# Altium PCB PCB2.PcbDoc
Units mm, origin at the board's own origin, x right, y up, seen from the top; angles counter-clockwise.
Board outline 104.65 x 36.58 mm, 2 copper layers (Top Layer, Bottom Layer); 10 components, 7 nets, 31 pads, 0 vias.
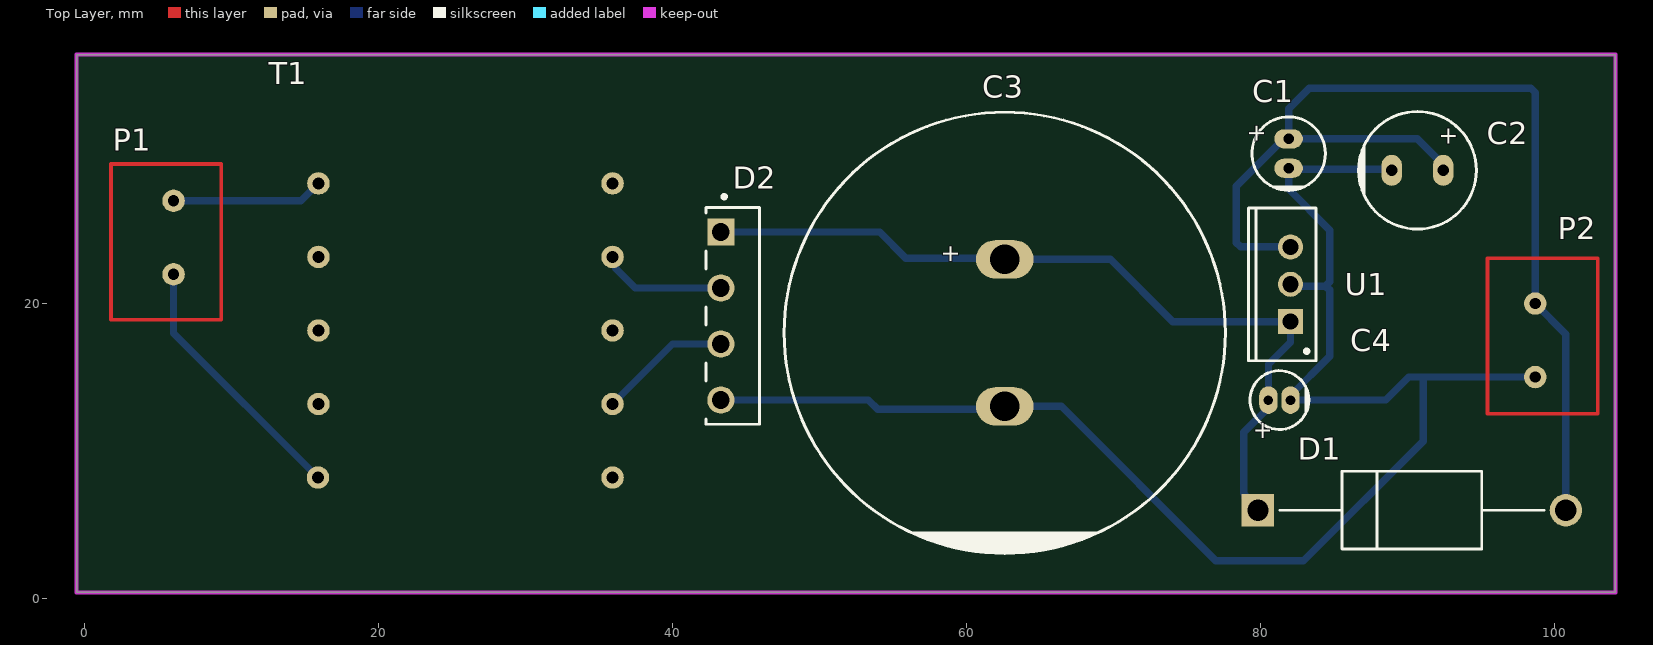
[diagram p0: Top Layer view]
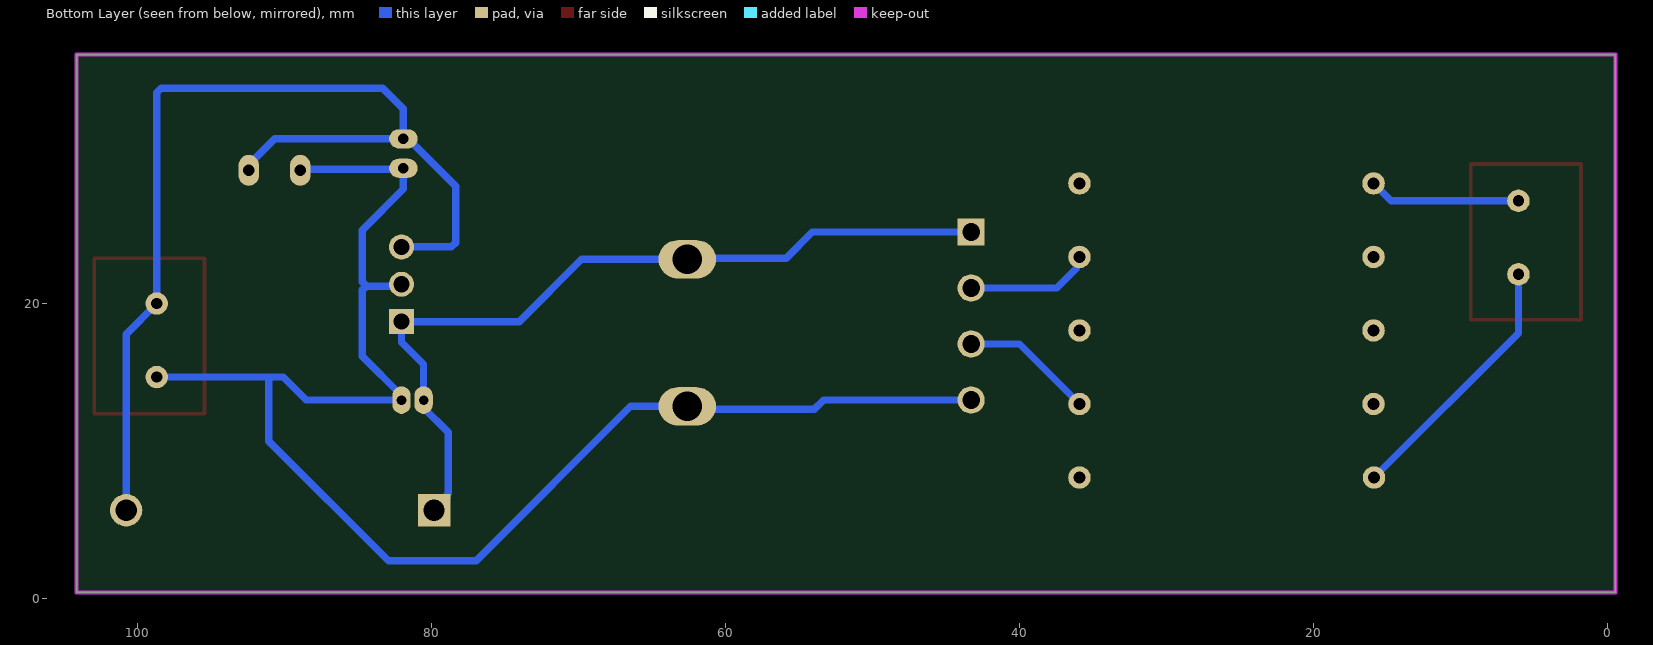
[diagram p1: Bottom Layer view, seen from below]
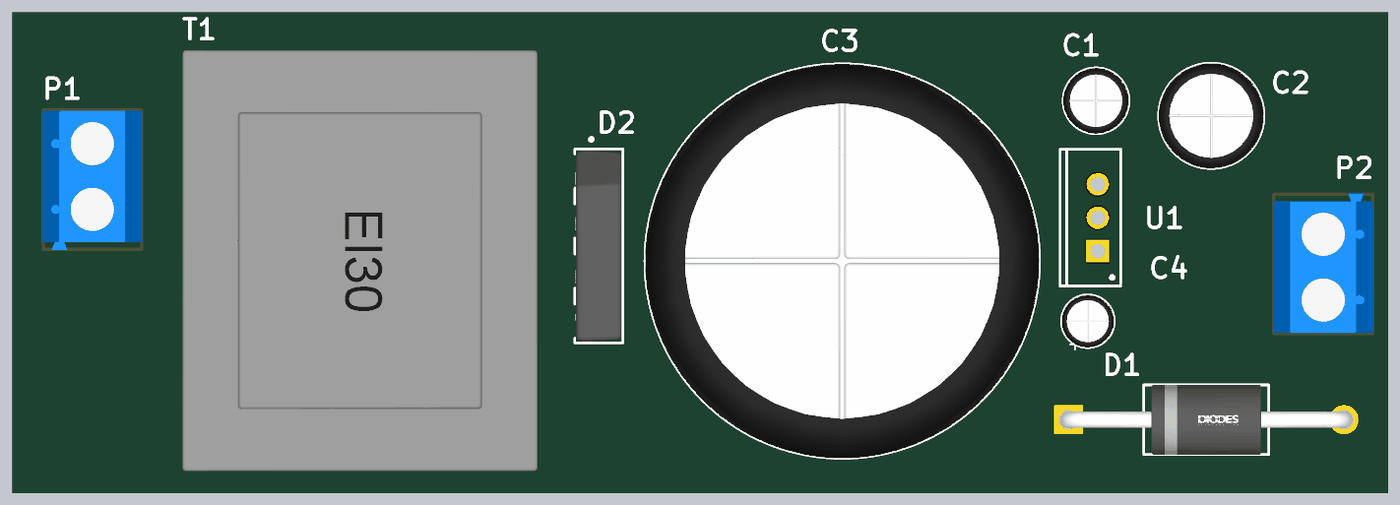
[diagram p2: 3D render of the assembled board from above, using the file's embedded part models]

## Layer stack, top to bottom
Top Solder: solder mask 0.0102, Solder Resist, Dk 3.5
Top Layer: signal copper 0.0356
Dielectric 1: dielectric 0.32, FR-4, Dk 4.8
Bottom Layer: signal copper 0.0356
Bottom Solder: solder mask 0.0102, Solder Resist, Dk 3.5

## Board outline
-0.508,0.381 -0.508,36.957 104.14,36.957 104.14,0.381

## Design rules (kind name [scope] priority, off if disabled: settings)
Clearance [All] p1: gap=0.001 ignorepadtopadclearanceinfootprint=FALSE
Height [All] p1: minheight=0 maxheight=50 prefheight=12.7
MinimumSolderMaskSliver [All] p1: minsoldermaskwidth=0.01
PasteMaskExpansion [All] p1: expansion=0.01
PolygonConnect [All] p1: connectstyle=Relief reliefconductorwidth=0.254 reliefentries=4 polygonreliefangle="90 Angle" airgapwidth=0.254
RoutingVias [All] p1: holewidth=0.711 width=1.27 viastyle="Through Hole" minholewidth=0.711 minwidth=1.27 maxholewidth=0.711 maxwidth=1.27
SilkToSilkClearance [All] p1: silktosilkclearance=0
SolderMaskExpansion [All] p1: expansion=0.102 istentingtop=FALSE
Width [All] p1: maxlimit=2 minlimit=0.01 preferedwidth=0.5 minimp=50.000000 maximp=50.000000 favimp=50.000000
26 further rules are at their usual default settings.

## Components (designator, comment, footprint, x,y, rotation, side; value= is the part's Value field where it differs from the comment)
C1 "0.1µF" "CAP TH ALUM ELEC D5.00mm S2.00mm H12.50mm" 81.915,30.226 r90 top
C2 "100µF" "CAP TH ALUM ELEC D8.00mm S3.50mm H13.00mm" 90.678,29.083 r0 top
C3 "10000µF" "CAP TH ALUM ELEC D30.00mm S10.00mm H42.00mm" 62.611,18.034 r90 top
C4 "0.33µF" "CAP TH ALUM ELEC D4.00mm S1.50mm H6.00mm" 81.292,13.462 r180 top
D1 "1N5408G-T" FP-DO-201AD-MFG 90.297,5.969 r0 top
D2 "KBP206G" FP-KBP-MFG 44.107,19.192 r270 top value=25pF
P1 "KF301-2P Terminal Block" "KF301-2P PCB layout" 5.588,24.511 r90 top
P2 "KF301-2P Terminal Block" "KF301-2P PCB layout" 99.187,17.526 r270 top
T1 "BV EI 30" PCBComponent_1 25.941,18.194 r0 top
U1 "L7812ABV" TO220 82.042,21.336 r90 top

## Footprints (in the part's own frame and the unit in brackets; to place one, negate y for a bottom-side part, rotate by r counter-clockwise, add the part's x,y. Pads: shape width x height; smd on the part's side, far side on the other; paste and mask are expansions set on the pad)
"CAP TH ALUM ELEC D4.00mm S1.50mm H6.00mm" [mm] "4mm Diameter 1.5mm Lead Spacing Aluminum Electrolytic Capacitors Radial, Can"
  oval 1.25x1.875 hole 0.65: 1(0.75,0) 2(-0.75,0)
  silkscreen extent -2,-2 2,2, body extent -2.01,-2 2,2, height 6
"CAP TH ALUM ELEC D5.00mm S2.00mm H12.50mm" [mm] "5mm Diameter 2mm Lead Spacing Aluminum Electrolytic Capacitors Radial, Can"
  oval 1.3x1.95 hole 0.7: 1(1,0) 2(-1,0)
  silkscreen extent -2.5,-2.5 2.5,2.5, body extent -2.51,-2.5 2.5,2.5, height 12.5
"CAP TH ALUM ELEC D8.00mm S3.50mm H13.00mm" [mm] "8mm Diameter 3.5mm Lead Spacing Aluminum Electrolytic Capacitors Radial, Can"
  oval 1.4x2.1 hole 0.8: 1(1.75,0) 2(-1.75,0)
  silkscreen extent -4,-4 4,4, body extent -4.01,-4 4,4, height 13
"CAP TH ALUM ELEC D30.00mm S10.00mm H42.00mm" [mm] "30mm Diameter 10mm Lead Spacing Aluminum Electrolytic Capacitors Radial, Can , Snap-In"
  oval 2.6x3.9 hole 2: 1(5,0) 2(-5,0)
  silkscreen extent -15,-15 15,15, body extent -15.01,-15 15,15, height 42
FP-DO-201AD-MFG [mm]
  rect 2.2x2.2 hole 1.45 paste-2539.97 mask+0: 1(-10.47,0)
  round 2.2 hole 1.45 paste-2539.97 mask+0: 2(10.47,0)
  silkscreen extent -8.97,-2.65 8.97,2.65, body extent -11.67,-2.75 11.67,2.75, height 0.25
FP-KBP-MFG [mm]
  rect 1.85x1.85 hole 1.2 paste-2539.97 mask+0: 1(-5.7,-0.8)
  round 1.85 hole 1.2 paste-2539.97 mask+0: 2(-1.89,-0.8) 3(1.92,-0.8) 4(5.73,-0.8)
  silkscreen extent -8.22,-1.83 7.37,1.83, body extent -7.47,-1.92 7.47,1.92, height 0.25
"KF301-2P PCB layout" [mil]
  round 60 hole 30: 1(98.43,-19.68) 2(-98.43,-19.68)
  Top Layer lines w10: -220,147.64 -220,-147.64 196.85,-147.64 196.85,147.64 -220,147.64
  body extent -222,-150 195,150, height 394
PCBComponent_1 [mm]
  round 1.524 / inner oval 2x1.524 / far side round 1.524 hole 0.8: 1(-10.033,-10) 2(-10,-5) 3(-10,0) 4(-10,5) 5(-10,10) 6(10,10) 7(10,5) 8(10,0) 9(10,-5) 10(10,-10)
  body extent -13.5,-16.13 13.5,15.87, height 24.02
TO220 [mm] "TO, Thru-Hole, Vertical, Heatsink Mounted; 3 In-Line Leads; Pitch 2.54 mm"
  rect 1.7x1.7 hole 1.1: 1(-2.54,0)
  round 1.7 hole 1.1: 2(0,0) 3(2.54,0)
  silkscreen extent -5.2,-1.75 5.2,2.85, body extent -5.25,-1.8 5.25,2.9, height 19.7

## Part data
C1: library part 860020672001, "CAP ALUM 0.1UF 20% 50V RADIAL", Device Package="Radial, Can", Lifetime @ Temp.="2000 Hrs @ 105°C", manufacturer="Würth Elektronik", Operating Temperature="-40°C ~ 105°C", Ripple Current @ High Frequency="2.21mA @ 100kHz", Ripple Current @ Low Frequency="1.3mA @ 120Hz", Supplier Part Number 1=732-8847-1-ND, Tolerance=±20%, Voltage - Rated=50V, Applications="General Purpose", Capacitance=0.1µF, componentlink1description=Datasheet, componentlink1url=https://katalog.we-online.de/pbs/datasheet/860020672001.pdf, componentlink2description="DigiKey Link", componentlink2url=http://digikey.com/product-detail/en/w-rth-elektronik/860020672001/732-8847-1-ND/5728792, Height - Seated (Max)="0.492\" (12.50mm)", lastupdated="4.09.2020 23:29:03", Lead Spacing="0.079\" (2.00mm)", Lifecycle Status=Active, Minimum Order=1, Mounting Type="Through Hole", Package / Case="Radial, Can", packaging=TapeAndBox, Part Number=860020672001, Part Status=Active, partid=22421, Polarization=Polar, price=0.06, series=WCAP-ATG5, Size / Dimension="0.197\" Dia (5.00mm)", Supplier 1=DigiKey
C2: library part 50YXG100MEFC8X11.5, "CAP ALUM 100UF 20% 50V RADIAL", Device Package="Radial, Can", Lifetime @ Temp.="4000 Hrs @ 105°C", manufacturer=Rubycon, Operating Temperature="-40°C ~ 105°C", Ripple Current @ High Frequency="555mA @ 100kHz", Ripple Current @ Low Frequency="277.5mA @ 120Hz", Supplier Part Number 1=1189-4021-ND, Tolerance=±20%, Voltage - Rated=50V, Applications="General Purpose", Capacitance=100µF, componentlink1description=Datasheet, componentlink1url=http://www.rubycon.co.jp/en/catalog/e_pdfs/aluminum/e_yxg.pdf, componentlink2description="DigiKey Link", componentlink2url=http://digikey.com/product-detail/en/rubycon/50YXG100MEFC8X11.5/1189-4021-ND/3563344, Height - Seated (Max)="0.512\" (13.00mm)", lastupdated="7.09.2020 05:24:53", Lead Spacing="0.138\" (3.50mm)", Lifecycle Status=Active, Minimum Order=1, Mounting Type="Through Hole", Package / Case="Radial, Can", packaging=Bulk, Part Number=50YXG100MEFC8X11.5, Part Status=Active, partid=23823, Polarization=Polar, price=0.43, series=YXG, Size / Dimension="0.315\" Dia (8.00mm)", Supplier 1=DigiKey, Impedance="170 mOhms"
C3: library part LLS1H103MELB, "CAP ALUM 10000UF 20% 50V SNAP", Device Package="Radial, Can - Snap-In", Lifetime @ Temp.="3000 Hrs @ 85°C", manufacturer=Nichicon, Operating Temperature="-40°C ~ 85°C", Ripple Current @ High Frequency="5.842A @ 50kHz", Ripple Current @ Low Frequency="5.08A @ 120Hz", Supplier Part Number 1=493-6156-ND, Tolerance=±20%, Voltage - Rated=50V, Applications="General Purpose", Capacitance=10000µF, componentlink1description=Datasheet, componentlink1url=http://nichicon-us.com/english/products/pdfs/e-lls.pdf, componentlink2description="DigiKey Link", componentlink2url=http://digikey.com/product-detail/en/nichicon/LLS1H103MELB/493-6156-ND/2548862, Height - Seated (Max)="1.654\" (42.00mm)", lastupdated="12.09.2020 10:14:53", Lead Spacing="0.394\" (10.00mm)", Lifecycle Status=Active, Minimum Order=1, Mounting Type="Through Hole", Package / Case="Radial, Can - Snap-In", packaging=Bulk, Part Number=LLS1H103MELB, Part Status=Active, partid=25520, Polarization=Polar, price=5.09, series=LLS, Size / Dimension="1.181\" Dia (30.00mm)", Supplier 1=DigiKey
C4: library part UMP1HR33MDD, "CAP ALUM 0.33UF 20% 50V RADIAL", Device Package="Radial, Can", Lifetime @ Temp.="2000 Hrs @ 85°C", manufacturer=Nichicon, Operating Temperature="-40°C ~ 85°C", Ripple Current @ High Frequency="4.2mA @ 10kHz", Ripple Current @ Low Frequency="2.8mA @ 120Hz", Supplier Part Number 1=493-17656-ND, Tolerance=±20%, Voltage - Rated=50V, Applications="General Purpose", Capacitance=0.33µF, componentlink1description=Datasheet, componentlink1url=http://nichicon-us.com/english/products/pdfs/e-ump.pdf, componentlink2description="DigiKey Link", componentlink2url=http://digikey.com/product-detail/en/nichicon/UMP1HR33MDD/493-17656-ND/2598755, Height - Seated (Max)="0.236\" (6.00mm)", lastupdated="6.09.2020 01:48:30", Lead Spacing="0.059\" (1.50mm)", Lifecycle Status=Active, Minimum Order=1, Mounting Type="Through Hole", Package / Case="Radial, Can", packaging=Bulk, Part Number=UMP1HR33MDD, Part Status=Active, partid=23159, Polarization=Bi-Polar, price=0.42, series=UMP, Size / Dimension="0.157\" Dia (4.00mm)", Supplier 1=DigiKey
D1: library part CMP-12791-000058-1, "DIODE GEN PURP 1KV 3A DO201AD", Average Rectified Current=3A, Capacitance=40pF, Case/Package=DO-201AD, Forward Voltage=1.1V, Max Operating Temperature=150°C, Max Repetitive Reverse Voltage (Vrrm)=1kV, Max Reverse Current=5uA, Max Surge Current=125A, Min Operating Temperature=-65°C, Package Quantity=1200, Current Rating=3A, Element Configuration=Single, Forward Current=3A, Height=5.3mm, Lead Free="Lead Free", Length=9.5mm, Max Reverse Voltage (DC)=1kV, Mount="Through Hole", Number of Pins=2, Output Current=3A, packaging="Tape and Reel", Peak Non-Repetitive Surge Current=125A, Polarity=Standard, Radiation Hardening=No, Recovery Time=2us, Reverse Recovery Time=2us, Reverse Voltage (DC)=1kV, RoHS Compliant=Yes, series=-, Voltage Rating (DC)=1kV, Weight=0.038801oz, Width=5.3mm
D2: library part CMP-12791-000035-1, "BRIDGE RECT 1PHASE 600V 2A KBP", Capacitance=25pF, Forward Current=2A, manufacturer="Diodes Inc.", Max Junction Temp=+150°C, Max Repetitive Reverse Voltage=600V, Max Surge Forward Current=65A, Package=KBP, Peak Reverse Current=5uA, Temperature="-65°C to +150°C", Temperature Range Low=-65°C, Automotive=No, Category=Diode, componentlink2description=Datasheet, componentlink2url=https://www.diodes.com/assets/Datasheets/ds21205.pdf, Device Class L1="Discrete Semiconductors", Device Class L2=Diodes, Device Class L3="Rectifier Diodes", Digikey Description="BRIDGE RECT 1PHASE 600V 2A KBP", Footprint Url=https://www.diodes.com/assets/Package-Files/KBP.pdf, Height=12.8mm, Lead Free=Yes, Manufacturer Part Number=KBP206G, Mouser Description="Bridge Rectifiers 2.0A 600V", Octopart=https://octopart.com/kbp206g-diodes+inc.-330175, Reverse Voltage=600V, RoHS=TRUE, Standoff Height=1.8mm, Temperature Range High=+150°C
P1 P2: "Rated current: 16A / Withstanding voltage: AC200V/1Min"
T1: "BV EI 30 / Primary Voltage 230V / Seconder Voltage  24V"
U1: library part CMP-0244-00453-1, "Positive Voltage Regulator, 12V, 3-Pin TO-220", componentlink1description="Manufacturer URL", componentlink1url=http://www.st.com, componentlink2description=Datasheet, componentlink2url=http://www.st.com/internet/com/TECHNICAL_RESOURCES/TECHNICAL_LITERATURE/DATASHEET/CD00000444.pdf, ComponentLink3Description="Package Specification", ComponentLink3URL=http://www.st.com/internet/com/TECHNICAL_RESOURCES/TECHNICAL_LITERATURE/PACKAGE_INFORMATION/CD00004649.pdf, DatasheetVersion=16/11/2011, PackageDescription="TO, Thru-Hole, Vertical, Heatsink Mounted; 3 In-Line Leads; Pitch 2.54 mm", PackageReference=TO220, PackageVersion=ver3.0

## Nets (pads, with @x,y where several pads share a name; then routed paths per layer and width w, separated by ;. In a path a pad name is that pad's centre, name@x,y a point inside that pad or via, vN(x,y) a via of type N, cw(c..) or ccw(c..) an arc to the next point about the centre after c; other vN are vias at no path point)
NetC1_1: C1.1 C2.1 D1.2 P2.2 U1.3 | length 72.9
  Bottom Layer w0.5: U1.3 78.652,23.876 78.359,24.169 78.359,27.995 81.59,31.226 C1.1 ; C2.1 92.428,29.46 90.662,31.226 C1.1 ; D1.2 100.767,17.946 P2.2 98.687,34.378 98.394,34.671 83.312,34.671 81.915,33.274 C1.1
NetC1_2: C1.2 C2.2 C3.2 C4.2 D2.4 P2.1 U1.2 | length 105.2
  Bottom Layer w0.5: D2.4 53.34,13.462 53.975,12.827 62.404,12.827 C3.2 66.468,13.034 76.962,2.54 82.931,2.54 91.059,10.668 91.059,15.026 ; U1.2 82.169,21.209 84.416,21.209 ; 84.67,20.955 84.416,21.209 ; 84.709,20.955 84.709,16.441 82.042,13.774 C4.2 88.519,13.462 90.083,15.026 91.059,15.026 ; C2.2 88.857,29.155 81.987,29.155 C1.2 81.915,27.813 84.709,25.019 84.709,21.502 84.416,21.209 ; P2.1 91.059,15.026
NetC3_1: C3.1 C4.1 D1.1 D2.1 U1.1 | length 55.8
  Bottom Layer w0.5: D2.1 54.102,24.892 55.88,23.114 62.531,23.114 C3.1 69.803,23.034 74.041,18.796 U1.1 82.042,17.399 80.542,15.899 80.542,12.947 78.867,11.272 78.867,7.112 78.977,7.002 78.977,6.819 D1.1
NetD2_2: D2.2 T1.7 | length 8.6
  Bottom Layer w0.5: T1.7 36.137,22.998 36.137,22.426 37.481,21.082 D2.2
NetD2_3: D2.3 T1.9 | length 9.1
  Bottom Layer w0.5: T1.9 40.019,17.272 D2.3
NetP1_1: P1.1 T1.5 | length 10.3
  Bottom Layer w0.5: P1.1 14.758,27.011 T1.5
NetP1_2: P1.2 T1.1 | length 17.9
  Bottom Layer w0.5: P1.2 6.088,18.014 T1.1
pads on no net: T1.2 T1.3 T1.4 T1.6 T1.8 T1.10

## Keep-outs
Keep-Out Layer:
  the board outline again, w0.254

## Text inside footprints (layer, text, board x,y; h text height)
C1: Top Overlay "+" at 80.665,30.926 h2 r90
C2: Top Overlay "+" at 92.128,30.483 h2
C3: Top Overlay "+" at 59.861,22.734 h2 r90
C4: Top Overlay "+" at 80.842,12.287 h2 r180